# Altium PCB PCB1.PcbDoc
Units mm, origin at the board's own origin, x right, y up, seen from the top; angles counter-clockwise.
Board outline 68.58 x 40.64 mm, 2 copper layers (Top Layer, Bottom Layer); 47 components, 47 nets, 183 pads, 27 vias.
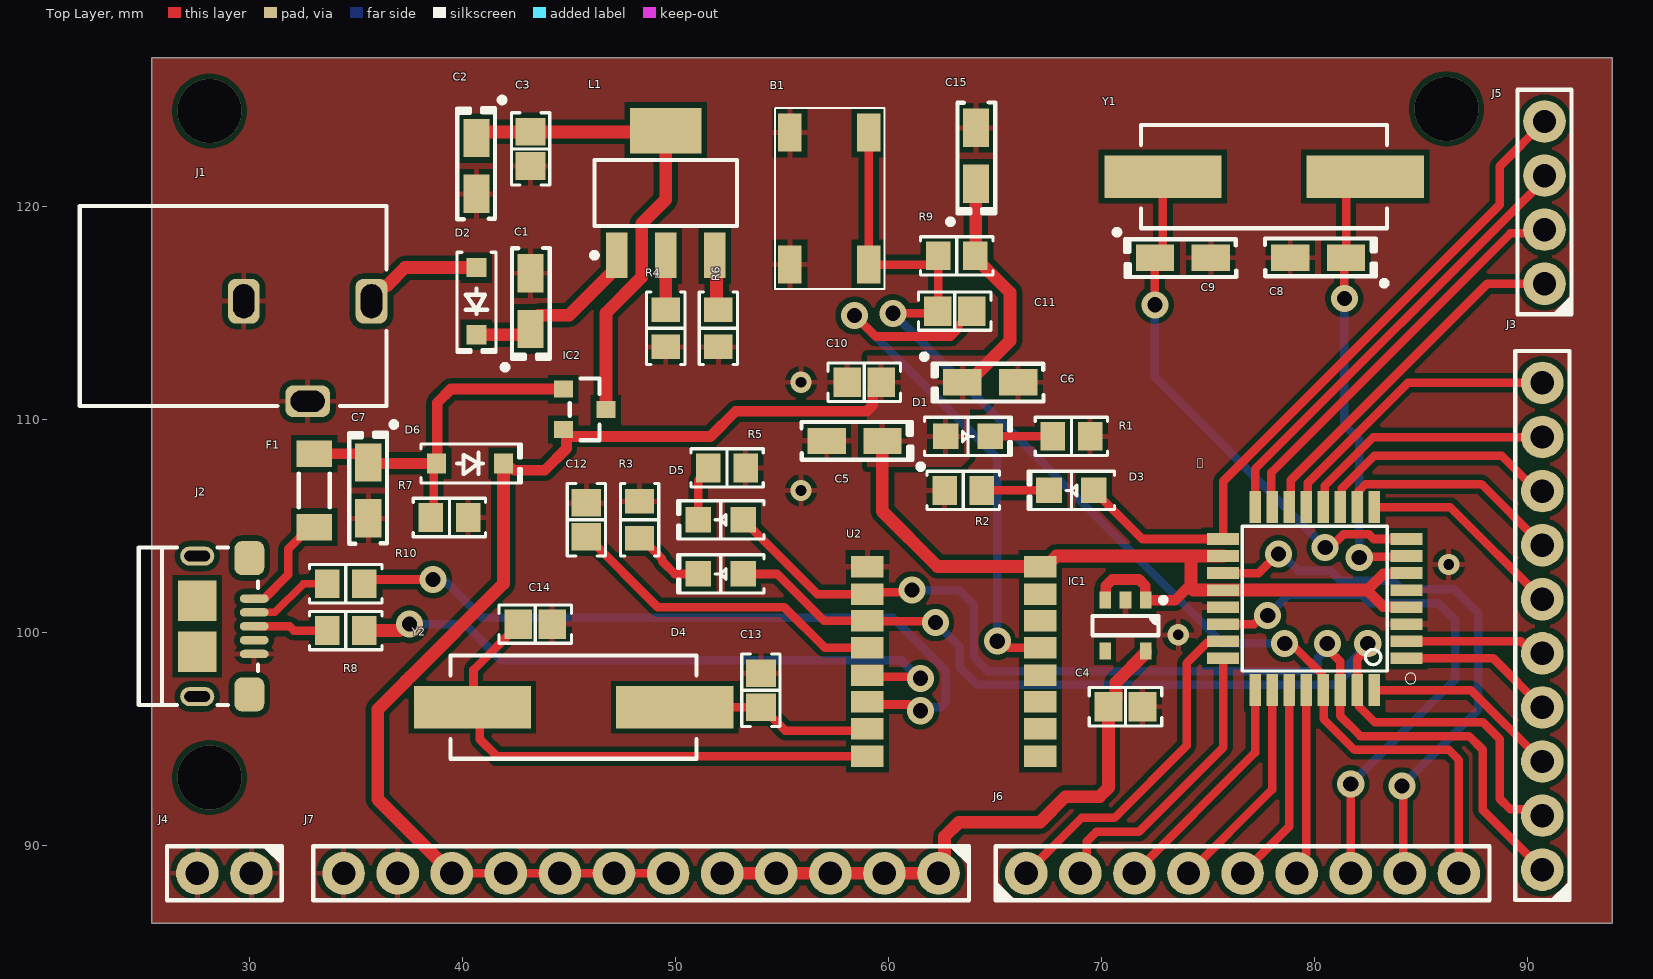
[diagram p0: Top Layer view]
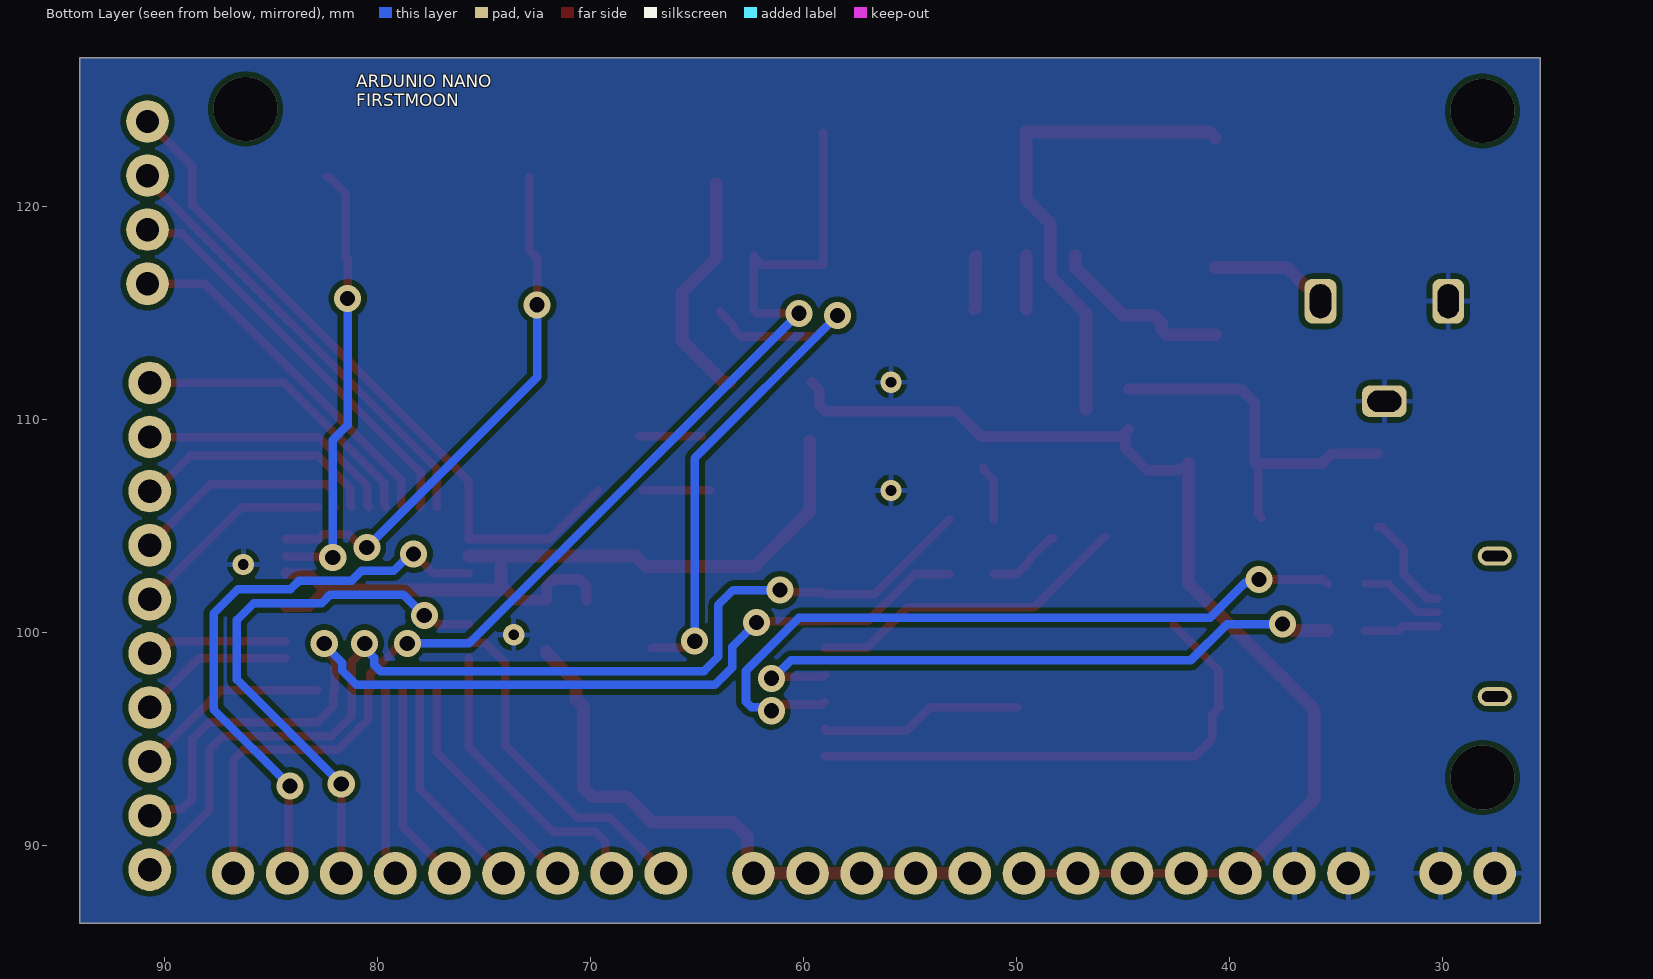
[diagram p1: Bottom Layer view, seen from below]
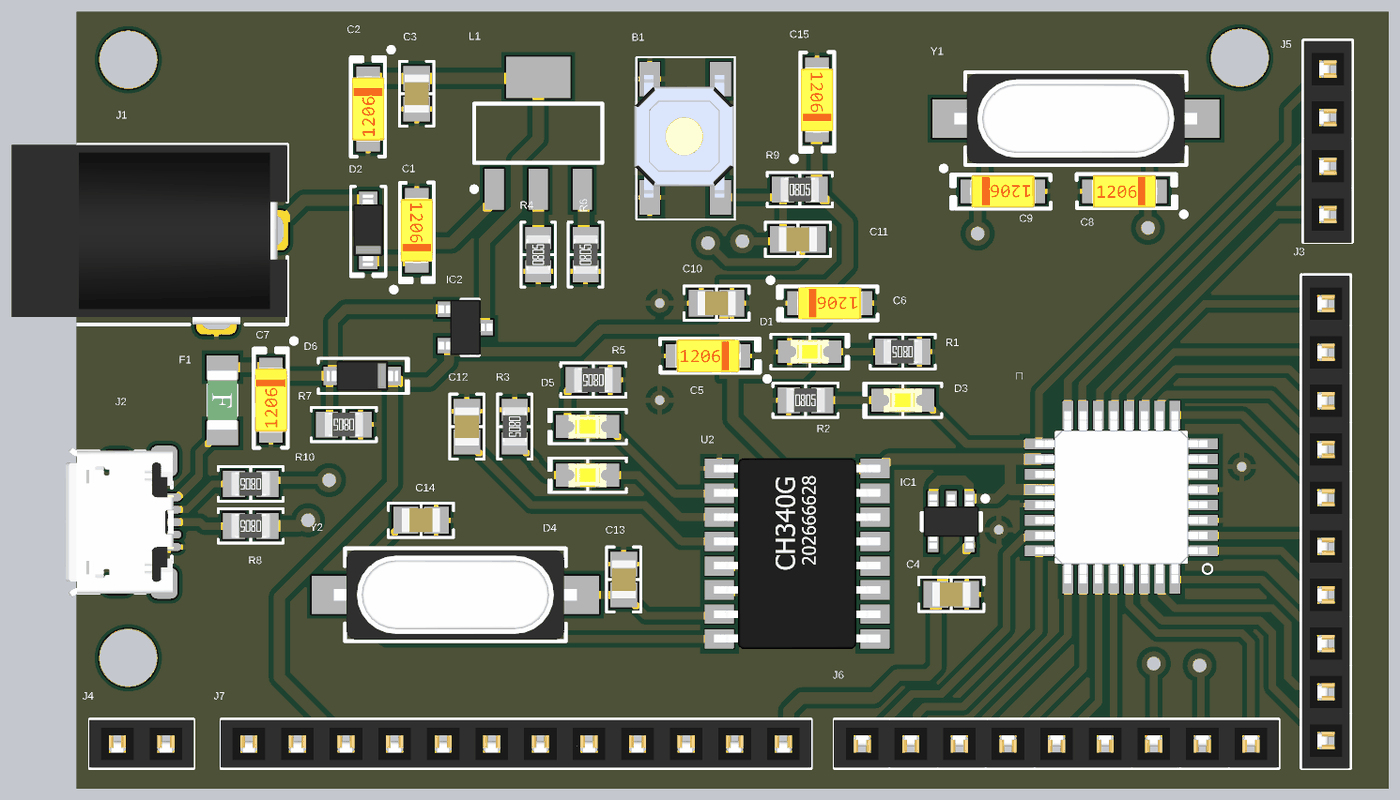
[diagram p2: 3D render of the assembled board from above, using the file's embedded part models]

## Layer stack, top to bottom
Top Solder: solder mask 0.0102, Solder Resist, Dk 3.5
Top Layer: signal copper 0.0356
Dielectric 1: dielectric 0.32, FR-4, Dk 4.8
Bottom Layer: signal copper 0.0356
Bottom Solder: solder mask 0.0102, Solder Resist, Dk 3.5

## Board outline
25.4,86.36 25.4,127 93.98,127 93.98,86.36

## Design rules (kind name [scope] priority, off if disabled: settings)
Clearance [All] p1: gap=0.254 ignorepadtopadclearanceinfootprint=FALSE except(0.126: Arc-SMDPad Track-SMDPad SMDPad-SMDPad)
PolygonConnect [All] p1: connectstyle=Relief reliefconductorwidth=0.254 reliefentries=4 polygonreliefangle="90 Angle" airgapwidth=0.254
RoutingVias [All] p1: holewidth=0.6 width=0.6 viastyle="Through Hole" minholewidth=0.3 minwidth=0.254 maxholewidth=4 maxwidth=4
SolderMaskExpansion [All] p1: expansion=0.102 istentingtop=FALSE
Width [All] p1: maxlimit=0.889 minlimit=0.254 preferedwidth=0.254
30 further rules are at their usual default settings.

## Components (designator, comment, footprint, x,y, rotation, side; value= is the part's Value field where it differs from the comment)
 "ATMEGA328P-AU" QFP80P900X900X120-32N 80.01,101.6 r180 top (schematic designator U1)
B1 "Push Button" "PUSB BUTTON-SMD" 59.06,123.49 r270 top
C1 "4.7 µF" "CAP POL 1206_3216" 43.18,115.57 r90 top
C2 "10 µF" "CAP POL 1206_3216" 40.64,121.92 r270 top
C3 "0.1 µF" "CAP 0805_2012" 43.18,122.72 r90 top
C4 "2.2 µF" "CAP 0805_2012" 71.12,96.52 r180 top
C5 "0.1 µF" "CAP POL 1206_3216" 58.4,109 r180 top
C6 "0.1 µF" "CAP POL 1206_3216" 64.77,111.76 r0 top
C7 "10 µF" "CAP POL 1206_3216" 35.56,106.68 r270 top
C8 "22pf" "CAP POL 1206_3216" 80.17,117.61 r180 top
C9 "22pf" "CAP POL 1206_3216" 73.82,117.61 r0 top
C10 "0.1 µF" "CAP 0805_2012" 58.85,111.76 r180 top
C11 "0.1 µF" "CAP 0805_2012" 63.1,115.1 r0 top
C12 "0.1 µF" "CAP 0805_2012" 45.8,105.3 r270 top
C13 "0.1 µF" "CAP 0805_2012" 54,97.3 r90 top
C14 "0.1 µF" "CAP 0805_2012" 43.4,100.4 r0 top
C15 "0.1 µF" "CAP POL 1206_3216" 64.1,122.4 r90 top
D1 "Yellow" "LED 0805_2012 YELLOW" 63.72,109.22 r0 top
D2 "SZMMSZ43T1G" SOD-123 40.64,115.57 r270 top
D3 "Yellow" "LED 0805_2012 YELLOW" 68.58,106.68 r180 top
D4 "Yellow" "LED 0805_2012 YELLOW" 52.11,102.76 r180 top
D5 "Yellow" "LED 0805_2012 YELLOW" 52.11,105.3 r180 top
D6 "SZMMSZ43T1G" SOD-123 40.335,107.95 r0 top
F1 "3413.0213.22" "FUSE 1206_3216 0.6MM" 33.02,106.68 r270 top
IC1 "AP2112K-3.3TRG1" "DIODES SOT-23-5 W5" 71.12,100.33 r270 top
IC2 "DMP2120U-7" "DIODES SOT-23-3" 45.72,110.49 r0 top
J1 "PJ-102AH" "CUI PJ-102AH" 29.21,115.57 r90 top
J2 "10118193-0001LF" "FCI USB 10118193-0001LF" 27.575,100.3 r90 top
J3 "M20-7821042" "HARWIN M20-7821045" 90.7,100.3 r180 top
J4 "M20-7820242" "HARWIN M20-7820245" 28.8,88.7 r270 top
J5 "M20-7820442" "HARWIN M20-7820445" 90.8,120.2 r180 top
J6 "M20-7820942" "HARWIN M20-7820945" 76.62,88.7 r90 top
J7 "M20-7821242" "HARWIN M20-7821245" 48.37,88.7 r270 top (schematic designator J7)
L1 "LM1117" LM1117_SOT230P700X180-4N 49.53,120.65 r90 top
R1 "240 Ohms" "RES 0805_2012" 68.58,109.22 r180 top
R2 "240 Ohms" "RES 0805_2012" 63.5,106.68 r0 top
R3 "240 Ohms" "RES 0805_2012" 48.3,105.3 r270 top
R4 "240 Ohms" "RES 0805_2012" 49.53,114.3 r90 top
R5 "240 Ohms" "RES 0805_2012" 52.41,107.74 r180 top
R6 "715 Ohms" "RES 0805_2012" 52,114.3 r90 top
R7 "10K" "RES 0805_2012" 39.37,105.41 r180 top
R8 "10K" "RES 0805_2012" 34.5,100.1 r180 top
R9 "10K" "RES 0805_2012" 63.2,117.7 r0 top
R10 "10K" "RES 0805_2012" 34.5,102.3 r180 top
U2 "CH340G" CH340G 63.064,98.648 r0 top
Y1 "12MHz" "TXC 9C" 77.63,121.42 r180 top
Y2 "12MHz" "TXC 9C" 45.2,96.5 r180 top

## Footprints (in the part's own frame and the unit in brackets; to place one, negate y for a bottom-side part, rotate by r counter-clockwise, add the part's x,y. Pads: shape width x height; smd on the part's side, far side on the other; paste and mask are expansions set on the pad)
"CAP 0805_2012" [mm] "Chip Capacitor, 2-Leads, Body 2.00x1.20mm, IPC Medium Density"
  rect 1.3x1.4 smd: 1(-0.8,0) 2(0.8,0)
  silkscreen extent -1.7,-0.9 1.7,0.9, body extent -1,-0.64 1,0.64, height 1.26
"CAP POL 1206_3216" [mm] "Molded Capacitor, 2-Leads, Body 3.20x1.6mm, IPC Medium Density"
  rect 1.8x1.23 smd: 1(-1.31,0) 2(1.31,0)
  silkscreen extent -3.22,-0.9 2.5,1.32, body extent -1.72,-0.85 1.71,0.85, height 1.7
CH340G [mil]
  rect 60x40 smd mask+2: 1(-160,175.5) 2(-160,124.5) 3(-160,75.5) 4(-160,25.5) 5(-160,-25.5) 6(-160,-74.5) 7(-160,-124.5) 8(-160,-175.5) 9(160,-175.5) 10(160,-124.5) 11(160,-74.5) 12(160,-25.5) 13(160,25.5) 14(160,75.5) 15(160,124.5) 16(160,175.5)
  body extent -171,-196 171,197, height 74
"CUI PJ-102AH" [mm] "DC Barrel Jack W/ Switch 2.0x5.5"
  rrect50% 2.1x1.5 hole 1 slot 1.6 at 0 deg: 1(0,-6.5) 2(0,-0.5)
  rrect50% 1.5x2.1 hole 1 slot 1.6 at 90 deg: 3(-4.7,-3.5)
  silkscreen extent -4.92,-7.2 4.47,7.2, body extent -4.92,-7.2 4.47,7.2, height 11
"DIODES SOT-23-3" [mm] "SOT23, 3-Leads, Body 2.90x2.40mm, Pitch 0.95mm, IPC Medium Density"
  rect 0.9x0.8 smd: 1(-1,0.95) 2(-1,-0.95) 3(1,0)
  silkscreen extent -0.7,-1.45 0.7,1.45, body extent -1.41,-1.45 1.41,1.45, height 1.5
"DIODES SOT-23-5 W5" [mm] "SOT23, 5-Leads, Body 3.00x2.85mm, Pitch 0.95mm, IPC Medium Density"
  rect 0.8x0.55 smd: 1(-1.2,0.95) 2(-1.2,0) 3(-1.2,-0.95) 4(1.2,-0.95) 5(1.2,0.95)
  silkscreen extent -1.32,-1.55 0.45,1.9, body extent -1.41,-1.45 1.41,1.45, height 1.5
"FCI USB 10118193-0001LF" [mm] "USB 2.0 Type B Micro"
  oval 0.4x1.35 smd: 1(1.3,-2.625) 2(0.65,-2.625) 3(0,-2.625) 4(-0.65,-2.625) 5(-1.3,-2.625)
  oval 0.9x1.6 hole 0.5 slot 1.2 at 90 deg: S(-3.3,0.05) S(3.3,0.05)
  rrect50% 1.6x1.4 smd: S(-3.2,-2.4) S(3.2,-2.4)
  rect 1.9x1.8 smd: S(-1.2,0.05) S(1.2,0.05)
  silkscreen extent -3.7,-2.8 3.7,2.8, body extent -3.93,-2.9 3.93,2.76, height 2.78
"FUSE 1206_3216 0.6MM" [mm] "Chip Fuse 1.5A AC 63V DC, 2-Leads, Body 3.10x1.55mm, IPC Medium Densitym"
  rect 1.25x1.65 smd: 1(-1.725,0) 2(1.725,0)
  silkscreen extent -0.8,-0.72 0.8,0.72, body extent -1.55,-0.77 1.55,0.78, height 0.76
"HARWIN M20-7820245" [mm] "2.54mm DIL PC TAIL PIN HEADER ASSEMBLY"
  round 2 hole 1.1: 1(0,1.27) 2(0,-1.27)
  silkscreen extent -1.27,-2.7 1.27,2.73, body extent -1.25,-2.74 1.25,2.74, height 8.5
"HARWIN M20-7820445" [mm] "2.54mm DIL PC TAIL PIN HEADER ASSEMBLY"
  round 2 hole 1.1: 1(0,3.81) 2(0,1.27) 3(0,-1.27) 4(0,-3.81)
  silkscreen extent -1.27,-5.3 1.27,5.27, body extent -1.25,-5.28 1.25,5.28, height 8.5
"HARWIN M20-7820945" [mm] "2.54mm DIL PC TAIL PIN HEADER ASSEMBLY"
  round 2 hole 1.1: 1(0,10.16) 2(0,7.62) 3(0,5.08) 4(0,2.54) 5(0,0) 6(0,-2.54) 7(0,-5.08) 8(0,-7.62) 9(0,-10.16)
  silkscreen extent -1.27,-11.6 1.27,11.62, body extent -1.25,-11.63 1.25,11.63, height 8.5
"HARWIN M20-7821045" [mm] "2.54mm DIL PC TAIL PIN HEADER ASSEMBLY"
  round 2 hole 1.1: 1(0,11.43) 2(0,8.89) 3(0,6.35) 4(0,3.81) 5(0,1.27) 6(0,-1.27) 7(0,-3.81) 8(0,-6.35) 9(0,-8.89) 10(0,-11.43)
  silkscreen extent -1.27,-12.93 1.27,12.89, body extent -1.25,-12.9 1.25,12.9, height 8.5
"HARWIN M20-7821245" [mm] "2.54mm DIL PC TAIL PIN HEADER ASSEMBLY"
  round 2 hole 1.1: 1(0,13.97) 2(0,11.43) 3(0,8.89) 4(0,6.35) 5(0,3.81) 6(0,1.27) 7(0,-1.27) 8(0,-3.81) 9(0,-6.35) 10(0,-8.89) 11(0,-11.43) 12(0,-13.97)
  silkscreen extent -1.27,-15.4 1.27,15.43, body extent -1.25,-15.44 1.25,15.44, height 8.5
"LED 0805_2012 YELLOW" [mm] "Chip Diode, 2-Leads, Body 2.00x1.25mm, IPC Medium Density"
  rect 1.2x1.2 smd: 1(-1.05,0) 2(1.05,0)
  silkscreen extent -2.03,-0.9 2.03,0.9, body extent -1,-0.62 1,0.63, height 0.9
LM1117_SOT230P700X180-4N [mm] "SOT223, 4-Leads, Body 6.50x7.00mm (avg), Pitch 2.30mm, IPC Medium Density"
  rect 2.15x1 smd: 1(-2.925,2.3) 2(-2.925,0) 3(-2.925,-2.3)
  rect 2.15x3.35 smd: 4(2.925,0)
  silkscreen extent -3.05,-3.35 1.55,3.47, body extent -1.85,-3.35 1.85,3.35, height 1.8
"PUSB BUTTON-SMD" [mm]
  rect 1.8x1.1 smd mask+0.05: 1(0,0) 2(6.2,0) 3(0,-3.7) 4(6.2,-3.7)
  silkscreen extent -1.15,-4.4 7.35,0.75, body extent -0.2,-4.5 6.2,0.7, height 1.5
QFP80P900X900X120-32N [mm]
  rect 1.5x0.55 smd mask+0.05: 1(-4.3,2.8) 2(-4.3,2) 3(-4.3,1.2) 4(-4.3,0.4) 5(-4.3,-0.4) 6(-4.3,-1.2) 7(-4.3,-2) 8(-4.3,-2.8) 17(4.3,-2.8) 18(4.3,-2) 19(4.3,-1.2) 20(4.3,-0.4) 21(4.3,0.4) 22(4.3,1.2) 23(4.3,2) 24(4.3,2.8)
  rect 0.55x1.5 smd mask+0.05: 9(-2.8,-4.3) 10(-2,-4.3) 11(-1.2,-4.3) 12(-0.4,-4.3) 13(0.4,-4.3) 14(1.2,-4.3) 15(2,-4.3) 16(2.8,-4.3) 25(2.8,4.3) 26(2,4.3) 27(1.2,4.3) 28(0.4,4.3) 29(-0.4,4.3) 30(-1.2,4.3) 31(-2,4.3) 32(-2.8,4.3)
  silkscreen extent -4.75,-3.4 3.4,4, body extent -4.5,-4.5 4.5,4.5, height 1.43
"RES 0805_2012" [mm] "Chip Resistor, 2-Leads, Body 2.00x1.25mm, IPC Medium Density"
  rect 1.15x1.35 smd: 1(-0.875,0) 2(0.875,0)
  silkscreen extent -1.7,-0.9 1.7,0.9, body extent -1,-0.62 1,0.63, height 0.6
SOD-123 [mm] "SOD, 2-Leads, Body 1.55x3.70mm, IPC Medium Density"
  rect 0.9x0.95 smd: 1(-1.575,0) 2(1.575,0)
  silkscreen extent -2.3,-0.92 2.41,0.92, body extent -1.86,-0.78 1.86,0.77, height 1.35
"TXC 9C" [mm] "Crystal, 2-Leads, Body 4.70x11.40mm, Pitch 8.80mm, IPC Medium Density"
  rect 5.5x2 smd: 1(-4.75,0) 2(4.75,0)
  silkscreen extent -5.77,-2.43 5.77,2.43, body extent -6.35,-2.35 6.35,2.35, height 4.2

## Part data
: "ATmega Series 20 MHz 32 KB Flash 2 KB SRAM 8-Bit Microcontroller - TQFP-32", Package=None, Availability=Unavailable, MP=ATMEGA328P-AU, price=None
B1: "Smd Push Button", Satın Alma Linki=https://urun.n11.com/diger/mini-pushbutton-switch-smd-P227461537?gclid=Cj0KCQjwkoDmBRCcARIsAG3xzl8Y_-jeD7HocNM6lvuZ_rVp83568XPGtNzlPwXWLph8oCRqo0yh87UaApZYEALw_wcB&gclsrc=aw.ds
C1 C5 C6 C8 C9 C15: library part T494A106K016AT, "CAP TANT 10UF 10% 16V 1206", Capacitance="10 µF", Device Package="1206 (3216 Metric)", ESR (Equivalent Series Resistance)=3Ohm, Lifetime @ Temp.="2000 Hrs @ 125°C", manufacturer=KEMET, Manufacturer Size Code=A, Operating Temperature="-55°C ~ 125°C", Supplier Part Number 1=399-9756-1-ND, Tolerance=±10%, Voltage - Rated="16 V", componentlink1description=Datasheet, componentlink1url=https://api.kemet.com/component-edge/download/datasheet/T494A106K016AT.pdf, componentlink2description="DigiKey Link", componentlink2url=https://www.digikey.com/en/products/detail/kemet/T494A106K016AT/3724803, Features="General Purpose", Height - Seated (Max)="0.071\" (1.80mm)", lastupdated="9/19/2022 1:38:10 PM", Lifecycle Status=Active, Minimum Order=1, Mounting Type="Surface Mount", Package / Case="1206 (3216 Metric)", packaging=TapeAndReel, Part Number=T494A106K016AT, Part Status=Active, partid=171, price=0.27, series=T494, Size / Dimension="0.126\" L x 0.063\" W (3.20mm x 1.60mm)", Supplier 1=DigiKey, Type=Molded
C2 C7: library part T494A106K016AT, "CAP TANT 10UF 10% 16V 1206", Device Package="1206 (3216 Metric)", ESR (Equivalent Series Resistance)=3Ohm, Lifetime @ Temp.="2000 Hrs @ 125°C", manufacturer=KEMET, Manufacturer Size Code=A, Operating Temperature="-55°C ~ 125°C", Supplier Part Number 1=399-9756-1-ND, Tolerance=±10%, Voltage - Rated="16 V", Capacitance="10 µF", componentlink1description=Datasheet, componentlink1url=https://api.kemet.com/component-edge/download/datasheet/T494A106K016AT.pdf, componentlink2description="DigiKey Link", componentlink2url=https://www.digikey.com/en/products/detail/kemet/T494A106K016AT/3724803, Features="General Purpose", Height - Seated (Max)="0.071\" (1.80mm)", lastupdated="9/19/2022 1:38:10 PM", Lifecycle Status=Active, Minimum Order=1, Mounting Type="Surface Mount", Package / Case="1206 (3216 Metric)", packaging=TapeAndReel, Part Number=T494A106K016AT, Part Status=Active, partid=171, price=0.27, series=T494, Size / Dimension="0.126\" L x 0.063\" W (3.20mm x 1.60mm)", Supplier 1=DigiKey, Type=Molded
C3 C10 C11 C12 C13 C14: library part CC0805JRX7R9BB104, "CAP CER 0.1UF 50V X7R 0805", Device Package="0805 (2012 Metric)", manufacturer=Yageo, Operating Temperature="-55°C ~ 125°C", Supplier Part Number 1=311-1858-1-ND, Temperature Coefficient=X7R, Tolerance=±5%, Voltage - Rated=50V, Applications="General Purpose", Capacitance="0.1 µF", componentlink1description=Datasheet, componentlink1url=https://www.yageo.com/upload/media/product/productsearch/datasheet/mlcc/UPY-GPHC_X7R_6.3V-to-50V_18.pdf, componentlink2description="DigiKey Link", componentlink2url=https://www.digikey.com/en/products/detail/yageo/CC0805JRX7R9BB104/5195265, lastupdated="9/19/2022 1:04:26 PM", Lifecycle Status=Active, Minimum Order=1, Mounting Type="Surface Mount, MLCC", Package / Case="0805 (2012 Metric)", packaging=TapeAndReel, Part Number=CC0805JRX7R9BB104, Part Status=Active, partid=42886, price=0.02, series=CC, Size / Dimension="0.079\" L x 0.049\" W (2.00mm x 1.25mm)", Supplier 1=DigiKey, Thickness (Max)="0.037\" (0.95mm)"
C4: library part CC0805JRX7R9BB104, "CAP CER 0.1UF 50V X7R 0805", Capacitance="0.1 µF", Device Package="0805 (2012 Metric)", manufacturer=Yageo, Operating Temperature="-55°C ~ 125°C", Supplier Part Number 1=311-1858-1-ND, Temperature Coefficient=X7R, Tolerance=±5%, Voltage - Rated=50V, Applications="General Purpose", componentlink1description=Datasheet, componentlink1url=https://www.yageo.com/upload/media/product/productsearch/datasheet/mlcc/UPY-GPHC_X7R_6.3V-to-50V_18.pdf, componentlink2description="DigiKey Link", componentlink2url=https://www.digikey.com/en/products/detail/yageo/CC0805JRX7R9BB104/5195265, lastupdated="9/19/2022 1:04:26 PM", Lifecycle Status=Active, Minimum Order=1, Mounting Type="Surface Mount, MLCC", Package / Case="0805 (2012 Metric)", packaging=TapeAndReel, Part Number=CC0805JRX7R9BB104, Part Status=Active, partid=42886, price=0.02, series=CC, Size / Dimension="0.079\" L x 0.049\" W (2.00mm x 1.25mm)", Supplier 1=DigiKey, Thickness (Max)="0.037\" (0.95mm)"
D1 D3 D4 D5: library part XZMYK54W-4, "2.0X1.2MM YELLOW SMD 0805 LED", Current - Test=20mA, Device Package="0805 (2012 Metric)", Lens Color=Colorless, manufacturer=SunLED, Millicandela Rating=148mcd, Supplier Device Package=0805, Supplier Part Number 1=1497-XZMYK54W-4CT-ND, Voltage - Forward (Vf) (Typ)=2V, Color=Yellow, componentlink1description=Datasheet, componentlink1url=https://www.sunledusa.com/products/spec/XZMYK54W-4.pdf, componentlink2description="DigiKey Link", componentlink2url=https://www.digikey.com/en/products/detail/sunled/XZMYK54W-4/13559632, Height (Max)=0.50mm, lastupdated="9/19/2022 1:51:12 PM", Lens Size="1.30mm x 1.25mm", Lens Style="Rectangle with Flat Top", Lens Transparency=Clear, Lifecycle Status=Active, Minimum Order=1, Mounting Type="Surface Mount", Package / Case="0805 (2012 Metric)", packaging=TapeAndReel, Part Number=XZMYK54W-4, Part Status=Active, partid=1049, price=0.05, series=-, Size / Dimension="2.00mm L x 1.25mm W", Supplier 1=DigiKey, Viewing Angle=140°, Wavelength - Dominant=590nm, Wavelength - Peak=590nm
D2 D6: "DIODE ZENER 43V 500MW SOD123", Current - Reverse Leakage @ Vr="50nA @ 30.1V", manufacturer="ON Semiconductor", Operating Temperature="-55°C ~ 150°C", Package / Case=SOD-123, Power - Max=500mW, Supplier Part Number 1=SZMMSZ43T1GOSCT-ND, Tolerance=±5%, Voltage - Forward (Vf) (Max) @ If="900mV @ 10mA", Voltage - Zener (Nom) (Vz)=43V, componentlink1description=Datasheet, componentlink1url=http://www.onsemi.com/pub/Collateral/MMSZ2V4T1-D.PDF, componentlink2description="DigiKey Link", componentlink2url=http://digikey.com/product-detail/en/on-semiconductor/SZMMSZ43T1G/SZMMSZ43T1GOSCT-ND/9087913, Impedance (Max) (Zzt)="150 Ohms", lastupdated="9/19/2022 1:47:10 PM", Lifecycle Status=Active, Minimum Order=1, Mounting Type="Surface Mount", packaging=CutTape, Part Number=SZMMSZ43T1G, Part Status=Active, partid=2372, price=0.30, series="Automotive, AEC-Q101", Supplier 1=DigiKey, Supplier Device Package=SOD-123
F1: "FUSE BOARD MNT 500MA 32VAC 63VDC", Breaking Capacity @ Rated Voltage=63A, Current Rating (Amps)=500mA, Device Package="1206 (3216 Metric)", manufacturer="Schurter Inc.", Operating Temperature="-55°C ~ 90°C", Supplier Part Number 1=486-1141-1-ND, Voltage Rating - AC=32V, Voltage Rating - DC=63V, Approval Agency="cURus, VDE", Approvals="cURus, VDE", componentlink1description=Datasheet, componentlink1url=https://us.schurter.com/pdf/english/typ_USI_1206.pdf, componentlink2description="DigiKey Link", componentlink2url=http://digikey.com/product-detail/en/schurter-inc/3413.0213.22/486-1141-1-ND/1522973, Fuse Type="Board Mount (Cartridge Style Excluded)", lastupdated="9/2/2020 1:30:41 AM", Lifecycle Status=Active, Melting I²t=0.041, Minimum Order=1, Mounting Type="Surface Mount", Package / Case="1206 (3216 Metric)", packaging=TapeAndReel, Part Number=3413.0213.22, Part Status=Active, price=0.26, Response Time="Fast Blow", series="USI 1206", Size / Dimension="0.126\" L x 0.063\" W x 0.024\" H (3.20mm x 1.60mm x 0.60mm)", Supplier 1=DigiKey
IC1: "IC REG LINEAR 3.3V 600MA SOT25", Current - Output=600mA, Current - Quiescent (Iq)="80 µA", manufacturer="Diodes Incorporated", Operating Temperature="-40°C ~ 85°C", Package / Case="SC-74A, SOT-753", Supplier Device Package=SOT-25, Supplier Part Number 1=AP2112K-3.3TRG1DICT-ND, Voltage - Input (Max)=6V, Voltage - Output (Min/Fixed)=3.3V, Voltage Dropout (Max)="0.4V @ 600mA", componentlink1description=Datasheet, componentlink1url=https://www.diodes.com/assets/Datasheets/AP2112.pdf, componentlink2description="DigiKey Link", componentlink2url=https://www.digikey.com/en/products/detail/diodes-incorporated/AP2112K-3-3TRG1/4470746, Control Features=Enable, lastupdated="9/19/2022 2:01:19 PM", Lifecycle Status=Active, Minimum Order=1, Mounting Type="Surface Mount", Number of Regulators=1, Output Configuration=Positive, Output Type=Fixed, packaging=TapeAndReel, Part Number=AP2112K-3.3TRG1, Part Status=Active, price=0.09, Protection Features="Over Current, Over Temperature", PSRR="65sB (100Hz ~ 1KHz)", series=-, Supplier 1=DigiKey
IC2: "MOSFET P-CH 20V 3.8A SOT23", Current - Continuous Drain (Id) @ 25°C="3.8A (Ta)", Drain to Source Voltage (Vdss)="20 V", Drive Voltage (Max Rds On,  Min Rds On)="1.8V, 4.5V", Input Capacitance (Ciss) (Max) @ Vds="487 pF @ 20 V", manufacturer="Diodes Incorporated", Operating Temperature="-55°C ~ 150°C (TJ)", Package / Case="TO-236-3, SC-59, SOT-23-3", Power Dissipation (Max)="800mW (Ta)", Supplier Device Package=SOT-23-3, Supplier Part Number 1=DMP2120U-7DICT-ND, componentlink1description=Datasheet, componentlink1url=https://www.diodes.com/assets/Datasheets/DMP2120U.pdf, componentlink2description="DigiKey Link", componentlink2url=https://www.digikey.com/en/products/detail/diodes-incorporated/DMP2120U-7/8275357, FET Type=P-Channel, Gate Charge (Qg) (Max) @ Vgs="6.3 nC @ 4.5 V", lastupdated="9/19/2022 2:00:15 PM", Lifecycle Status=Active, Minimum Order=1, Mounting Type="Surface Mount", packaging=TapeAndReel, Part Number=DMP2120U-7, Part Status=Active, price=0.07, Rds On (Max) @ Id, Vgs="62mOhm @ 4.2A, 4.5V", series=-, Supplier 1=DigiKey, Technology="MOSFET (Metal Oxide)", Vgs (Max)=±8V, Vgs(th) (Max) @ Id="1V @ 250µA"
J1: "CONN PWR JACK 2X5.5MM SOLDER", Current Rating (Amps)=5A, manufacturer="CUI Devices", Material Flammability Rating="UL94 V-0", Supplier Part Number 1=CP-102AH-ND, Voltage - Rated=24VDC, Actual Diameter="0.079\" (2.00mm ID), 0.256\" (6.50mm OD)", componentlink1description=Datasheet, componentlink1url=https://www.cuidevices.com/product/resource/digikeypdf/pj-102ah.pdf, componentlink2description="DigiKey Link", componentlink2url=//digikey.com/product-detail/en/cui-devices/PJ-102AH/CP-102AH-ND/408448, Connector Type=Jack, Gender=Male, Industry Recognized Mating Diameter="2.00mm ID (0.079\"), 5.50mm OD (0.217\")", Internal Switch(s)="Single Switch, Normally Closed", lastupdated="12/16/2019 7:01:27 PM", Lifecycle Status=0, Mating Length/Depth="0.354\" (9.00mm)", Minimum Order=1, Mounting Type="Through Hole, Right Angle", Number of Positions/Contacts="2 Conductors, 3 Contacts", packaging=Tray, Part Number=PJ-102AH, Part Status=Active, price=0.76, series=-, Shielding=Unshielded, Supplier 1=DigiKey, Termination=Solder
J2: "CONN RCPT USB2.0 MICRO B SMD R/A", Current Rating (Amps)="1.8A per Contact", manufacturer="Amphenol ICC (FCI)", Operating Temperature="-30°C ~ 80°C", Supplier Part Number 1=609-4616-2-ND, Voltage - Rated=100VAC, componentlink1description=Datasheet, componentlink1url=https://cdn.amphenol-icc.com/media/wysiwyg/files/documentation/datasheet/inputoutput/io_usb_micro.pdf, componentlink2description="DigiKey Link", componentlink2url=//digikey.com/product-detail/en/amphenol-icc-fci/10118193-0001LF/609-4616-2-ND/2785388, Connector Type="USB - micro B", Features="Solder Retention", Gender=Receptacle, lastupdated="12/9/2019 8:51:28 PM", Lifecycle Status=0, Mating Cycles=10000, Minimum Order=1, Mounting Feature=Horizontal, Mounting Type="Surface Mount, Right Angle; Through Hole", Number of Contacts=5, Number of Ports=1, packaging=TapeAndReel, Part Number=10118193-0001LF, Part Status=Active, price=0.21, series=-, Shielding=Shielded, Specifications="USB 2.0", Supplier 1=DigiKey, Termination=Solder
J3: "CONN RCPT 10POS 0.1 GOLD PCB", Current Rating (Amps)=3A, Insulation Color=Black, manufacturer="Harwin Inc.", Material Flammability Rating="UL94 V-0", Operating Temperature="-40°C ~ 105°C", Supplier Part Number 1=952-1846-ND, componentlink1description=Datasheet, componentlink1url=https://cdn.harwin.com/pdfs/Harwin_PC_Connectors_M20.pdf, componentlink2description="DigiKey Link", componentlink2url=http://digikey.com/product-detail/en/harwin-inc/M20-7821042/952-1846-ND/3727813, Connector Type=Receptacle, Contact Finish - Mating=Gold, Contact Finish - Post=Tin, Contact Finish Thickness - Mating=Flash, Contact Length - Post="0.118\" (3.00mm)", Contact Type="Female Socket", Fastening Type=Push-Pull, Insulation Height="0.335\" (8.51mm)", lastupdated="9/21/2022 6:59:03 PM", Lifecycle Status=Active, Mated Stacking Heights="11.04mm, 12.63mm", Minimum Order=1, Mounting Type="Through Hole", Number of Positions=10, Number of Positions Loaded=All, Number of Rows=1, packaging=Tube, Part Number=M20-7821042, Part Status=Active, Pitch - Mating="0.100\" (2.54mm)", price=1.39, series=M20, Style="Board to Board or Cable", Supplier 1=DigiKey, Termination=Solder
J4: "CONN RCPT 2POS 0.1 GOLD PCB", Current Rating (Amps)=3A, Insulation Color=Black, manufacturer="Harwin Inc.", Material Flammability Rating="UL94 V-0", Operating Temperature="-40°C ~ 105°C", Supplier Part Number 1=952-1775-ND, componentlink1description=Datasheet, componentlink1url=https://cdn.harwin.com/pdfs/C001XX_M20_Series_Connectors.pdf, componentlink2description="DigiKey Link", componentlink2url=https://www.digikey.com/en/products/detail/harwin-inc/M20-7820242/3727744, Connector Type=Receptacle, Contact Finish - Mating=Gold, Contact Finish - Post=Tin, Contact Finish Thickness - Mating=Flash, Contact Length - Post="0.118\" (3.00mm)", Contact Type="Female Socket", Fastening Type=Push-Pull, Insulation Height="0.335\" (8.51mm)", lastupdated="9/21/2022 6:53:47 PM", Lifecycle Status=Active, Mated Stacking Heights="11.04mm, 12.63mm", Minimum Order=1, Mounting Type="Through Hole", Number of Positions=2, Number of Positions Loaded=All, Number of Rows=1, packaging=Tube, Part Number=M20-7820242, Part Status=Active, Pitch - Mating="0.100\" (2.54mm)", price=0.38, series=M20, Style="Board to Board or Cable", Supplier 1=DigiKey, Termination=Solder
J5: "CONN RCPT 4POS 0.1 GOLD PCB", Current Rating (Amps)=3A, Insulation Color=Black, manufacturer="Harwin Inc.", Material Flammability Rating="UL94 V-0", Operating Temperature="-40°C ~ 105°C", Supplier Part Number 1=952-1791-ND, componentlink1description=Datasheet, componentlink1url=https://cdn.harwin.com/pdfs/Harwin_PC_Connectors_M20.pdf, componentlink2description="DigiKey Link", componentlink2url=https://www.digikey.com/en/products/detail/harwin-inc/M20-7820442/3727760, Connector Type=Receptacle, Contact Finish - Mating=Gold, Contact Finish - Post=Tin, Contact Finish Thickness - Mating=Flash, Contact Length - Post="0.118\" (3.00mm)", Contact Type="Female Socket", Fastening Type=Push-Pull, Insulation Height="0.335\" (8.51mm)", lastupdated="9/21/2022 6:57:11 PM", Lifecycle Status=Active, Mated Stacking Heights="11.04mm, 12.63mm", Minimum Order=1, Mounting Type="Through Hole", Number of Positions=4, Number of Positions Loaded=All, Number of Rows=1, packaging=Tube, Part Number=M20-7820442, Part Status=Active, Pitch - Mating="0.100\" (2.54mm)", price=0.45, series=M20, Style="Board to Board or Cable", Supplier 1=DigiKey, Termination=Solder
J6: "CONN RCPT 9POS 0.1 GOLD PCB", Current Rating (Amps)=3A, Insulation Color=Black, manufacturer="Harwin Inc.", Material Flammability Rating="UL94 V-0", Operating Temperature="-40°C ~ 105°C", Supplier Part Number 1=M20-7820942-ND, componentlink1description=Datasheet, componentlink1url=https://cdn.harwin.com/pdfs/C001XX_M20_Series_Connectors.pdf, componentlink2description="DigiKey Link", componentlink2url=http://digikey.com/product-detail/en/harwin-inc/M20-7820942/M20-7820942-ND/3919444, Connector Type=Receptacle, Contact Finish - Mating=Gold, Contact Finish - Post=Tin, Contact Finish Thickness - Mating=Flash, Contact Type="Female Socket", Fastening Type=Push-Pull, lastupdated="9/21/2022 6:58:48 PM", Lifecycle Status=Active, Mated Stacking Heights="11.04mm, 12.63mm", Minimum Order=5016, Mounting Type="Through Hole", Number of Positions=9, Number of Positions Loaded=All, Number of Rows=1, packaging=Tube, Part Number=M20-7820942, Part Status=Active, price=0.59, series=M20, Style="Board to Board or Cable", Supplier 1=DigiKey, Termination=Solder
J7: "CONN RCPT 12POS 0.1 GOLD PCB", Current Rating (Amps)=3A, Insulation Color=Black, manufacturer="Harwin Inc.", Material Flammability Rating="UL94 V-0", Operating Temperature="-40°C ~ 105°C", Supplier Part Number 1=952-1852-ND, componentlink1description=Datasheet, componentlink1url=https://cdn.harwin.com/pdfs/C001XX_M20_Series_Connectors.pdf, componentlink2description="DigiKey Link", componentlink2url=http://digikey.com/product-detail/en/harwin-inc/M20-7821242/952-1852-ND/3727819, Connector Type=Receptacle, Contact Finish - Mating=Gold, Contact Finish - Post=Tin, Contact Finish Thickness - Mating=Flash, Contact Type="Female Socket", Fastening Type=Push-Pull, lastupdated="9/21/2022 6:59:31 PM", Lifecycle Status=Active, Mated Stacking Heights="11.04mm, 12.63mm", Minimum Order=5004, Mounting Type="Through Hole", Number of Positions=12, Number of Positions Loaded=All, Number of Rows=1, packaging=Tube, Part Number=M20-7821242, Part Status=Active, price=0.74, series=M20, Style="Board to Board or Cable", Supplier 1=DigiKey, Termination=Solder
L1: "LM1117 voltaj regulator"
R1 R2 R3 R4 R5 R6 R7 R8 R9 R10: library part ERJ-6ENF3001V, "RES SMD 3K OHM 1% 1/8W 0805", Device Package="0805 (2012 Metric)", manufacturer="Panasonic Electronic Components", Operating Temperature="-55°C ~ 155°C", Power (Watts)="0.125W, 1/8W", Ratings=AEC-Q200, Resistance="3 kOhms", Supplier Device Package=0805, Supplier Part Number 1=P3.0KCCT-ND, Temperature Coefficient=±100ppm/°C, Tolerance=±1%, componentlink1description=Datasheet, componentlink1url=https://industrial.panasonic.com/cdbs/www-data/pdf/RDA0000/AOA0000C304.pdf, componentlink2description="DigiKey Link", componentlink2url=https://www.digikey.com/en/products/detail/panasonic-electronic-components/ERJ-6ENF3001V/366038, Composition="Thick Film", Features="Automotive AEC-Q200", Height - Seated (Max)="0.028\" (0.70mm)", lastupdated="9/19/2022 1:36:50 PM", Lifecycle Status=Active, Minimum Order=1, Number of Terminations=2, Package / Case="0805 (2012 Metric)", packaging=TapeAndReel, Part Number=ERJ-6ENF3001V, Part Status=Active, partid=30109, price=0.01, series=ERJ-6EN, Size / Dimension="0.079\" L x 0.049\" W (2.00mm x 1.25mm)", Supplier 1=DigiKey
U2: "CH320G ,USB_TO_TTL CONVERTER"
Y1 Y2: library part 9C-12.000MAAJ-T, "CRYSTAL 12.0000MHZ 18PF SMD", ESR (Equivalent Series Resistance)="40 Ohms", Frequency Stability=±30ppm, Load Capacitance=18pF, manufacturer="TXC CORPORATION", Operating Mode=Fundamental, Operating Temperature="-20°C ~ 70°C", Package / Case=HC-49/US, Supplier Part Number 1=887-1053-1-ND, componentlink1description=Datasheet, componentlink1url=http://www.txccorp.com/download/products/quartz_crystals/2015TXC_9C_32.pdf, componentlink2description="DigiKey Link", componentlink2url=http://digikey.com/product-detail/en/txc-corporation/9C-12.000MAAJ-T/887-1053-1-ND/2118930, Frequency=12MHz, Frequency Tolerance=±30ppm, Height - Seated (Max)="0.161\" (4.10mm)", lastupdated="9/19/2022 1:51:59 PM", Lifecycle Status=Active, Minimum Order=1, Mounting Type="Surface Mount", packaging=TapeAndReel, Part Number=9C-12.000MAAJ-T, Part Status=Active, partid=707, price=0.22, series=9C, Size / Dimension="0.449\" L x 0.189\" W (11.40mm x 4.80mm)", Supplier 1=DigiKey, Type="MHz Crystal"

## Via types
v1: diameter 1.27, hole 0.711, Top Layer to Bottom Layer, 12 vias
v2: diameter 1.27, hole 0.711, Top Layer to Bottom Layer, tented both sides, 6 vias
v3: diameter 1, hole 0.5, Top Layer to Bottom Layer, tented both sides, 4 vias
v4: diameter 3, hole 3, Top Layer to Bottom Layer, 3 vias
v5: diameter 1.27, hole 0.711, Top Layer to Bottom Layer, tented top, 2 vias

## Nets (pads, with @x,y where several pads share a name; then routed paths per layer and width w, separated by ;. In a path a pad name is that pad's centre, name@x,y a point inside that pad or via, vN(x,y) a via of type N, cw(c..) or ccw(c..) an arc to the next point about the centre after c; other vN are vias at no path point)
3V3: C4.2 IC1.5 J7.1 J7.2 J7.3 J7.4 J7.5 | length 27.8
  Top Layer w0.6: J7.5 J7.4 J7.3 J7.2 J7.1 62.627,88.987 62.627,90.427 63.3,91.1 67.1,91.1 68.3,92.3 69.9,92.3 70.32,92.72 C4.2 70.67,96.87 70.67,97.655 72.07,99.055 IC1.5
5V: .4 .6 .18 .20 C5.1 C6.1 C10.1 C15.1 D1.1 D6.2 IC1.1 IC1.3 IC2.2 J7.6 J7.7 J7.8 J7.9 J7.10 R9.2 U2.16 | length 105.5
  Top Layer w0.406: J7.10 J7.9 J7.8 J7.7 J7.6
  Top Layer w0.5: D6.2@41.936,107.95 41.936,107.899 42.11,107.725 42.302,107.725 42.403,107.623 43.844,107.623 44.87,108.649 IC2.2@44.87,109.163 ; IC2.2 44.87,109.39 44.921,109.39 45.097,109.213 51.631,109.213 52.817,110.4 58.957,110.4 59.25,110.693 59.25,111.41 C10.1@59.601,111.76 ; IC1.3 70.195,101.555 70.195,102.195 70.5,102.5 71.752,102.5 72.045,102.207 72.045,101.555 IC1.1 73.453,101.53 74.023,102.1 74.2,102.1 ; .4 84.285,101.225 83.235,101.225 82.46,102 83.235,102.775 84.285,102.775 .6
  Top Layer w0.6: J7.10 36,92.18 36,96.393 37.274,97.667 37.274,97.676 37.524,97.926 37.533,97.926 41.91,102.303 D6.2 ; C5.1 59.7,108.99 59.7,105.7 62.295,103.105 U2.16 67.382,103.105 67.877,103.6 74.2,103.6 ; C6.1 63.745,111.76 65.7,113.715 65.7,115.975 64.075,117.6 R9.2 64.087,117.713 64.087,121.077 C15.1 ; .18 74.2,103.6 ; 82.46,102 .20 74.3,102 74.2,102.1 74.2,103.6
NetB1_1: .29 B1.1 B1.2 C11.1 J6.9 R9.1 | length 56.1
  Top Layer w0.4: B1.1 B1.2 61.95,117.29 R9.1@62.325,117.665 ; v2(60.2,115) 62.2,115 C11.1 62.325,115.125 R9.1@62.325,117.665 ; R9.1 R9.1@62.325,117.665 ; v1(78.6,99.5) 78.766,99.334 79.063,99.334 80.335,98.061 80.335,97.375 80.425,97.285 80.425,95.95 81.883,94.492 86.308,94.492 86.78,94.02 J6.9
  Bottom Layer w0.4: v2(60.2,115) 75.7,99.5 v1(78.6,99.5)
NetC1_1: C1.1 D2.2 L1.1 | length 8.6
  Top Layer w0.6: D2.2 42.915,113.995 C1.1 43.18,114.545 43.541,114.906 44.986,114.906 47.23,117.15 L1.1
NetC2_1: C2.1 C3.2 IC2.3 L1.4 | length 23.3
  Top Layer w0.6: C2.1 40.93,123.52 C3.2 49.475,123.52 L1.4 49.53,120.342 48.4,119.212 48.4,116.7 46.72,115.02 IC2.3
NetC7_1: C7.1 D6.1 F1.1 IC2.1 R7.2 | length 17.7
  Top Layer w0.4: R7.2 38.628,105.543 38.628,107.818 D6.1
  Top Layer w0.508: F1.1 35.199,108.405 35.56,108.044 C7.1 35.6,107.95 D6.1 38.8,107.99 38.8,110.8 39.44,111.44 IC2.1
NetC8_1: .7 C8.1 Y1.1 | length 20.9
  Top Layer w0.4: v2(81.4,115.7) 81.4,117.53 C8.1 81.48,120.62 82.28,121.42 Y1.1 ; v1(82.1,103.532) 82.134,103.566 84.276,103.566 .7
  Bottom Layer w0.4: v2(81.4,115.7) 81.4,109.75 82.1,109.05 v1(82.1,103.532)
NetC9_1: .8 C9.1 Y1.2 | length 25
  Top Layer w0.4: v2(72.5,115.4) 72.5,117.6 C9.1 72.88,117.98 Y1.2 ; v1(80.5,104) 80.735,104 81.356,104.621 82.551,104.621 82.772,104.4 .8
  Bottom Layer w0.4: v2(72.5,115.4) 72.5,112 v1(80.5,104)
NetC11_2: C11.2 U2.13 | length 26.8
  Top Layer w0.4: v2(58.4,114.9) 59.389,113.911 62.922,113.911 63.276,114.265 63.276,114.426 63.9,115.05 C11.2 ; v1(65.1,99.6) 65.335,99.6 65.643,99.292 67.125,99.292 U2.13
  Bottom Layer w0.4: v2(58.4,114.9) 65.1,108.2 v1(65.1,99.6)
NetC12_2: C12.2 U2.4 | length 15.4
  Top Layer w0.406: C12.2 45.85,104.5 49.15,101.2 55.1,101.2 57,99.3 58.995,99.3 U2.4
NetC13_1: C13.1 U2.7 Y2.1 | length 9.5
  Top Layer w0.406: Y2.1 C13.1 54.05,96.5 55.15,95.4 58.915,95.4 U2.7
NetC14_1: C14.1 U2.8 Y2.2 | length 25
  Top Layer w0.406: C14.1 42.6,100.35 40.5,98.25 40.5,96.55 Y2.2 40.8,96.15 40.8,95 41.61,94.19 U2.8
NetD1_2: D1.2 R1.2 | length 2.9
  Top Layer w0.4: D1.2 R1.2
NetD2_1: D2.1 J1.1 | length 5.7
  Top Layer w0.6: J1.1 35.71,115.805 36.197,116.291 36.431,116.291 37.285,117.145 D2.1
NetD3_1: .17 D3.1 J5.4 | length 32.9
  Top Layer w0.4: D3.1 71.91,104.4 .17 75.71,107.11 88.7,120.1 88.7,121.91 J5.4
NetD3_2: D3.2 R2.2 | length 3.2
  Top Layer w0.4: R2.2 D3.2
NetD4_1: .31 D4.1 J3.2 U2.3 | length 48.7
  Top Layer w0.4: U2.3 59.033,100.533 62.142,100.533 v1(62.197,100.478) ; v1(82.5,99.5) 82.5,99.265 82.01,98.775 .31 82.085,97.225 82.085,96.539 82.824,95.8 87.9,95.8 88.7,95 88.7,92.2 89.184,91.716 90.394,91.716 J3.2
  Top Layer w0.406: D4.1 54.766,102.76 56.961,100.565 U2.3
  Bottom Layer w0.4: v1(62.197,100.478) 63.346,99.329 63.346,98.354 64,97.699 64.154,97.546 80.986,97.546 81.66,98.22 81.66,98.594 82.5,99.434 v1(82.5,99.5)
NetD4_2: D4.2 R3.2 | length 3.5
  Top Layer w0.406: R3.2 48.4,104.425 49.368,103.457 49.368,103.357 49.965,102.76 D4.2
NetD5_1: .30 D5.1 J3.1 U2.2 | length 50.7
  Top Layer w0.4: U2.2 59.095,101.905 61.005,101.905 v1(61.1,102) ; v1(80.6,99.5) 80.6,99.265 81.21,98.655 .30 81.2,97.29 81.2,96.1 82.154,95.146 87.254,95.146 87.9,94.5 87.9,91.67 J3.1
  Top Layer w0.406: D5.1 56.66,101.8 58.99,101.8 U2.2
  Bottom Layer w0.4: v1(61.1,102) 63.3,102 64,101.3 64,98.86 64.66,98.2 79.871,98.2 80.151,98.48 80.151,98.815 80.6,99.265 v1(80.6,99.5)
NetD5_2: D5.2 R5.2 | length 2.6
  Top Layer w0.406: D5.2 51.06,107.165 51.535,107.64 R5.2
NetF1_2: F1.2 J2.1 | length 4.9
  Top Layer w0.406: J2.1 30.669,101.6 31.8,102.731 31.8,103.935 32.82,104.955 F1.2
NetJ2_2: J2.2 R10.2 | length 4
  Top Layer w0.356: J2.2 30.208,100.958 31.175,100.958 32.517,102.3 R10.2
NetJ2_3: J2.3 R8.2 | length 3.5
  Top Layer w0.4: J2.3 31.862,100.3 32.062,100.1 R8.2
NetJ3_3: .32 J3.3 | length 9.3
  Top Layer w0.4: .32 87.35,97.3 J3.3
NetJ3_4: .1 J3.4 | length 7.3
  Top Layer w0.4: .1 88.39,98.8 J3.4
NetJ3_5: .2 J3.5 | length 6.6
  Top Layer w0.4: .2 89.697,99.6 90.267,99.03 J3.5
NetJ3_6: .9 J3.6 | length 9.7
  Top Layer w0.4: .9 86.37,105.9 J3.6
NetJ3_7: .10 J3.7 | length 10.7
  Top Layer w0.4: .10 82.085,105.975 82.085,106.661 82.4,106.976 87.834,106.976 J3.7
NetJ3_8: .11 J3.8 | length 11.6
  Top Layer w0.4: .11 81.285,105.975 81.285,106.786 82.799,108.3 88.8,108.3 90.45,106.65 J3.8
NetJ3_9: .12 J3.9 | length 12.2
  Top Layer w0.4: .12 80.485,105.975 80.485,106.911 82.764,109.19 J3.9
NetJ3_10: .13 J3.10 | length 14.1
  Top Layer w0.4: .13 79.685,105.975 79.685,107.036 84.379,111.73 J3.10
NetJ5_1: .14 J5.1 | length 17
  Top Layer w0.4: .14 78.885,105.975 78.885,107.161 88.114,116.39 J5.1
NetJ5_2: .15 J5.2 | length 19.2
  Top Layer w0.4: .15 77.975,105.935 77.975,107.525 89.2,118.75 90.62,118.75 J5.2
NetJ5_3: .16 J5.3 | length 21.2
  Top Layer w0.4: .16 77.21,107.685 90.8,121.275 J5.3
NetJ6_1: .23 J6.1 | length 16
  Top Layer w0.4: J6.1 69.06,91.3 70.6,91.3 74,94.7 74,98.576 74.949,99.525 75.635,99.525 .23
NetJ6_2: .24 J6.2 | length 14.1
  Top Layer w0.4: J6.2 69.306,89.006 69.306,90.206 69.746,90.646 71.746,90.646 75.71,94.61 .24
NetJ6_3: .25 J6.3 | length 10.9
  Top Layer w0.4: J6.3 77.21,94.37 .25
NetJ6_4: .26 J6.4 | length 10.2
  Top Layer w0.4: J6.4 78.01,92.63 .26
NetJ6_5: .27 J6.5 | length 9.5
  Top Layer w0.4: J6.5 78.81,90.89 .27
NetJ6_6: .28 J6.6 | length 8.8
  Top Layer w0.4: J6.6 79.16,89.133 79.61,89.583 .28 .28@79.65,97.26
NetJ6_7: .22 J6.7 | length 25.9
  Top Layer w0.4: .22 77.165,100.4 77.565,100.8 v1(77.8,100.8) ; J6.7 v5(81.7,92.9)
  Bottom Layer w0.4: v1(77.8,100.8) 78.789,101.789 82.218,101.789 82.613,101.394 85.806,101.394 86.6,100.6 86.6,97.8 v5(81.7,92.9)
NetJ6_8: .19 J6.8 | length 27.3
  Top Layer w0.4: .19 77.383,102.8 78.283,103.7 v1(78.3,103.7) ; v5(84.1,92.8) 84.17,92.73 84.17,88.77 J6.8
  Bottom Layer w0.4: v1(78.3,103.7) 78.447,103.7 79.247,102.9 80.76,102.9 81.217,102.443 83.687,102.443 84.082,102.048 86.552,102.048 87.7,100.9 87.7,96.4 v5(84.1,92.8)
NetL1_2: L1.2 R4.2 | length 2.5
  Top Layer w0.6: R4.2 L1.2
NetL1_3: L1.3 R6.2 | length 2.6
  Top Layer w0.508: L1.3 L1.3@51.915,117.64 ; R6.2@51.915,115.26 R6.2
  Top Layer w0.6: R6.2@51.915,115.26 L1.3@51.915,117.64
NetR8_1: R8.1 U2.5 | length 29.9
  Top Layer w0.406: U2.5 59.071,97.929 61.43,97.929 v1(61.501,97.858)
  Top Layer w0.6: R8.1 37.019,100.1 37.319,100.4 v2(37.5,100.4)
  Bottom Layer w0.406: v2(37.5,100.4) 40.1,100.4 41.8,98.7 60.582,98.7 61.424,97.858 v1(61.501,97.858)
NetR10_1: R10.1 U2.6 | length 34.7
  Top Layer w0.406: R10.1 35.575,102.5 v2(38.6,102.5) ; U2.6 59.128,96.628 60.973,96.628 61.266,96.334 v1(61.5,96.334)
  Bottom Layer w0.406: v2(38.6,102.5) 38.765,102.335 39.265,102.335 40.9,100.7 60.204,100.7 62.689,98.215 62.689,96.754 62.435,96.5 62.17,96.5 ; v1(61.5,96.334) 61.665,96.5 62.169,96.5
"SHORT WAY": .3 .5 .21 B1.3 B1.4 C1.2 C2.2 C3.1 C4.1 C5.2 C6.2 C7.2 C8.2 C9.2 C10.2 C12.1 C13.2 C14.2 C15.2 IC1.2 J1.2 J1.3 J2.5 J4.1 J4.2 J7.11 J7.12 R1.1 R2.1 R3.1 R4.1 R5.1 R6.1 R7.1 U2.1
  other v3: 73.6,99.9 86.3,103.2 55.88,106.68 55.88,111.76
pads on no net: IC1.4 J2.4 J2.S U2.9 U2.10 U2.11 U2.12 U2.14 U2.15
copper on no net:
  other v4: 28.1,93.2 28.1,124.5 86.2,124.6

## Polygon pours and split planes (outlines as drawn)
"SHORT WAY" on Top Layer "SHORT_WAY_L01_P002" (solid, pour order 2): 93.98,127 93.98,86.36 25.4,86.36 25.4,127
5V on Top Layer "5V_L01_P001" (solid, pour order 1): 59,113 59,107.8 63.4,107.8 63.8,108.2 63.8,110.5 64.4,110.5 64.7,110.8 64.6,110.9 64.6,113
"SHORT WAY" on Bottom Layer "SHORT_WAY_L02_P000" (solid, pour order 0): 93.98,127 93.98,86.36 25.4,86.36 25.4,127

## Silkscreen, mask and mechanical layers (free items; w line width, h text height)
Bottom Overlay:
  text "ARDUNIO NANO" at 81,125.411 h1
  text "FIRSTMOON" at 81,124.511 h1
Mechanical 1:
  the board outline again, w0.076